# Altium PCB NaviGo v3.0.PcbDoc (part 2 of 4)
Units mm, origin at the board's own origin, x right, y up, seen from the top; angles counter-clockwise.
Board outline 144.78 x 52.07 mm, 2 copper layers (Top Layer, Bottom Layer); 380 components, 29 nets, 1630 pads, 230 vias.
Unrouted connection lines stored in the file: 261.
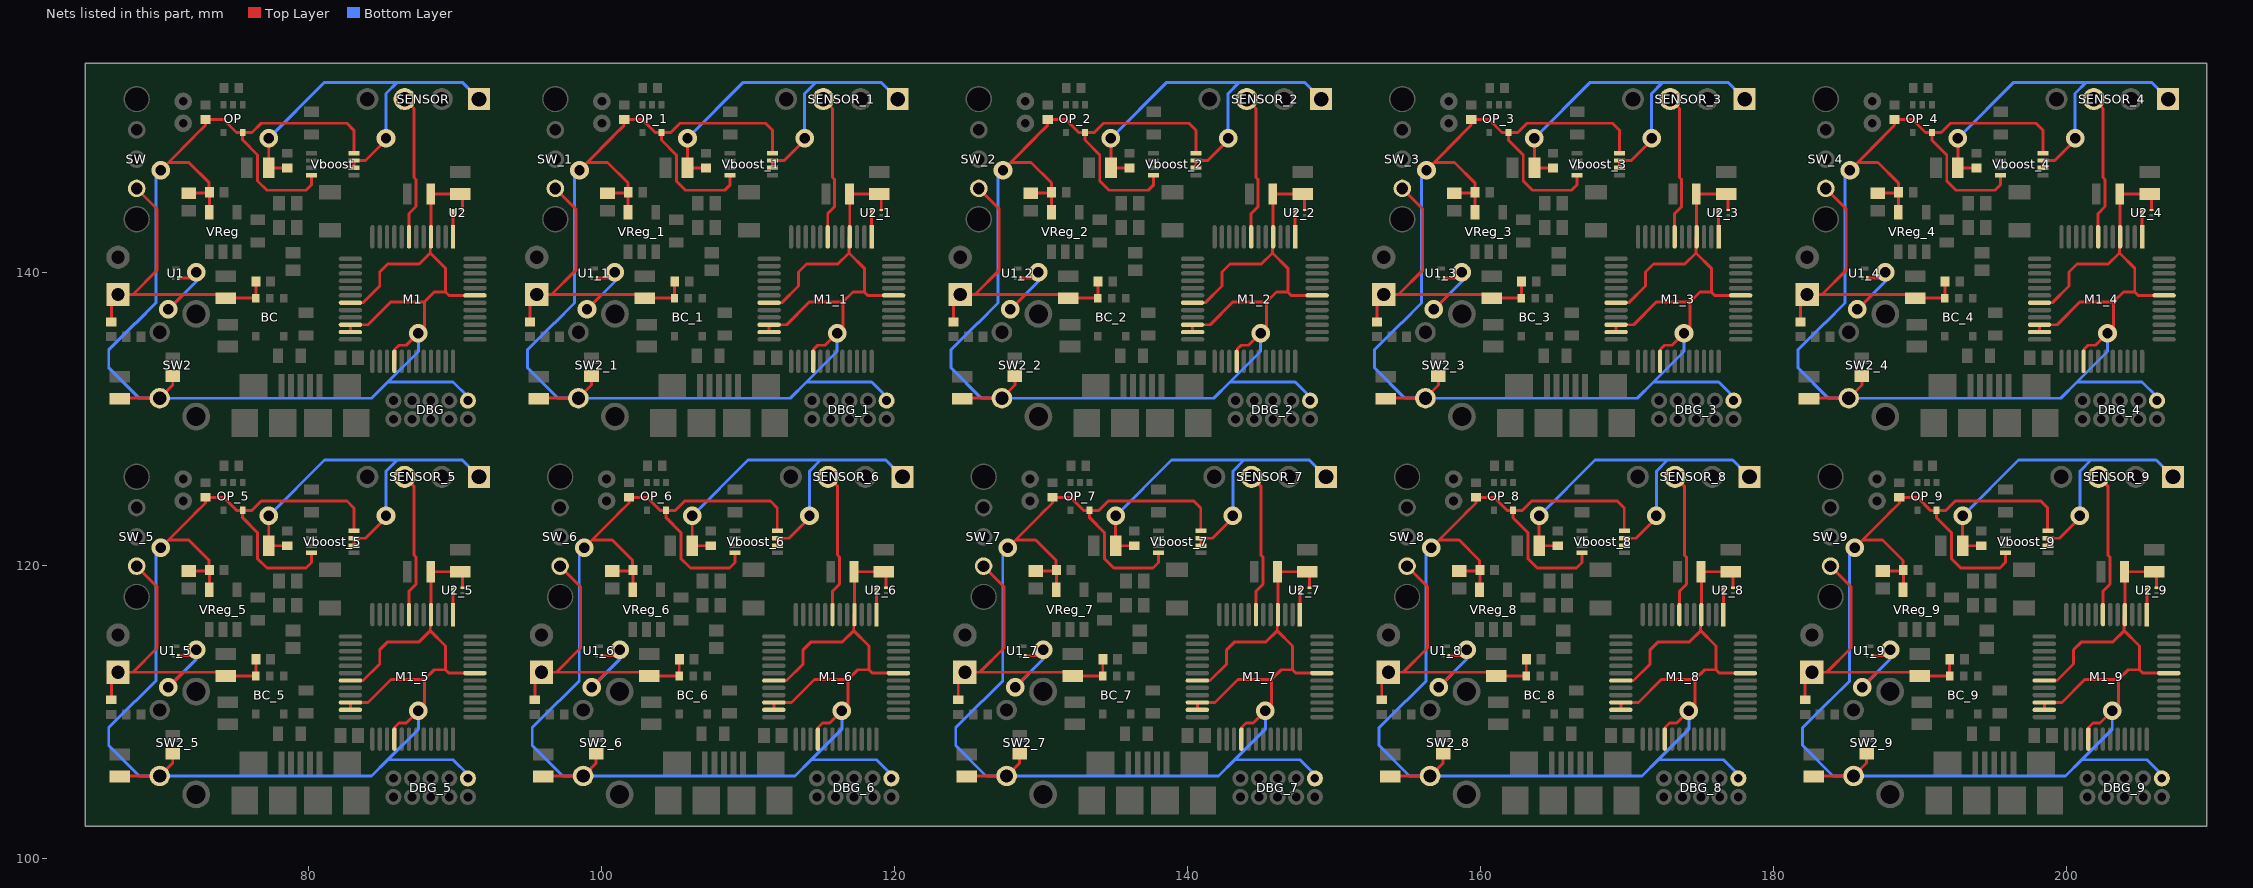
[diagram p2: the nets of this part, all layers, seen from the top]

## Via types
v1: diameter 1.27, hole 0.711, Top Layer to Bottom Layer, 220 vias
v2: diameter 1.1, hole 0.711, Top Layer to Bottom Layer, 10 vias

## Nets (pads, with @x,y where several pads share a name; then routed paths per layer and width w, separated by ;. In a path a pad name is that pad's centre, name@x,y a point inside that pad or via, vN(x,y) a via of type N, cw(c..) or ccw(c..) an arc to the next point about the centre after c; other vN are vias at no path point)
3V5: C1.1 C1_1.1 C1_2.1 C1_3.1 C1_4.1 C1_5.1 C1_6.1 C1_7.1 C1_8.1 C1_9.1 C7.1 C7_1.1 C7_2.1 C7_3.1 C7_4.1 C7_5.1 C7_6.1 C7_7.1 C7_8.1 C7_9.1 C8.1 C8_1.1 C8_2.1 C8_3.1 C8_4.1 C8_5.1 C8_6.1 C8_7.1 C8_8.1 C8_9.1 C12.2 C12_1.2 C12_2.2 C12_3.2 C12_4.2 C12_5.2 C12_6.2 C12_7.2 C12_8.2 C12_9.2 DBG.10 DBG_1.10 DBG_2.10 DBG_3.10 DBG_4.10 DBG_5.10 DBG_6.10 DBG_7.10 DBG_8.10 DBG_9.10 L1.1 L1_1.1 L1_2.1 L1_3.1 L1_4.1 L1_5.1 L1_6.1 L1_7.1 L1_8.1 L1_9.1 M1.4 M1.19 M1.22 M1.23 M1.28 M1.43 M1_1.4 M1_1.19 M1_1.22 M1_1.23 M1_1.28 M1_1.43 M1_2.4 M1_2.19 M1_2.22 M1_2.23 M1_2.28 M1_2.43 M1_3.4 M1_3.19 M1_3.22 M1_3.23 M1_3.28 M1_3.43 M1_4.4 M1_4.19 M1_4.22 M1_4.23 M1_4.28 M1_4.43 M1_5.4 M1_5.19 M1_5.22 M1_5.23 M1_5.28 M1_5.43 M1_6.4 M1_6.19 M1_6.22 M1_6.23 M1_6.28 M1_6.43 M1_7.4 M1_7.19 M1_7.22 M1_7.23 M1_7.28 M1_7.43 M1_8.4 M1_8.19 M1_8.22 M1_8.23 M1_8.28 M1_8.43 M1_9.4 M1_9.19 M1_9.22 M1_9.23 M1_9.28 M1_9.43 OP.5 OP_1.5 OP_2.5 OP_3.5 OP_4.5 OP_5.5 OP_6.5 OP_7.5 OP_8.5 OP_9.5 R6.1 R6_1.1 R6_2.1 R6_3.1 R6_4.1 R6_5.1 R6_6.1 R6_7.1 R6_8.1 R6_9.1 R8.2 R8_1.2 R8_2.2 R8_3.2 R8_4.2 R8_5.2 R8_6.2 R8_7.2 R8_8.2 R8_9.2 SW2.2 SW2_1.2 SW2_2.2 SW2_3.2 SW2_4.2 SW2_5.2 SW2_6.2 SW2_7.2 SW2_8.2 SW2_9.2 U2.3 U2_1.3 U2_2.3 U2_3.3 U2_4.3 U2_5.3 U2_6.3 U2_7.3 U2_8.3 U2_9.3 Vboost.4 Vboost.8 Vboost_1.4 Vboost_1.8 Vboost_2.4 Vboost_2.8 Vboost_3.4 Vboost_3.8 Vboost_4.4 Vboost_4.8 Vboost_5.4 Vboost_5.8 Vboost_6.4 Vboost_6.8 Vboost_7.4 Vboost_7.8 Vboost_8.4 Vboost_8.8 Vboost_9.4 Vboost_9.8 VReg.5 VReg_1.5 VReg_2.5 VReg_3.5 VReg_4.5 VReg_5.5 VReg_6.5 VReg_7.5 VReg_8.5 VReg_9.5 | length 1146.7
  Top Layer w0.2: C7_5.1@67.132,105.632 67.168,105.668 SW2_5.2@69.214,105.668 ; C7.1@67.132,131.413 67.168,131.449 SW2.2@69.214,131.449 ; SW2_5.2@69.849,105.668 70.739,106.558 C8_5.1@70.739,107.188 ; SW2.2@69.849,131.449 70.739,132.339 C8.1@70.739,132.969 ; v1(69.926,121.235) 70.452,121.761 ; v1(69.926,147.016) 70.452,147.542 ; C12_5.2@71.831,119.659 R8_5.2@73.158,119.659 ; C12.2@71.831,145.44 R8.2@73.158,145.44 ; R8_5.2@73.228,119.659 73.228,120.364 71.831,121.761 70.452,121.761 ; R8.2@73.228,145.44 73.228,146.145 71.831,147.542 70.452,147.542 ; VReg_5.5@73.244,118.381 R8_5.2@73.244,119.729 ; VReg.5@73.244,144.162 R8.2@73.244,145.51 ; Vboost_5.4@80.207,120.891 80.207,120.231 79.832,119.856 77.165,119.856 76.53,120.491 76.53,122.269 75.514,123.285 OP_5.5@75.514,123.798 ; Vboost.4@80.207,146.672 80.207,146.012 79.832,145.637 77.165,145.637 76.53,146.272 76.53,148.05 75.514,149.066 OP.5@75.514,149.579 ; M1_5.23@82.865,110.181 M1_5.22@82.865,110.681 84.069,110.681 85.63,112.242 87.914,112.242 ; M1_5.19@82.865,112.181 83.733,112.181 84.866,113.314 84.866,114.274 85.414,114.822 87.556,114.822 88.315,115.581 ; M1.23@82.865,135.962 M1.22@82.865,136.462 84.069,136.462 85.63,138.023 87.914,138.023 ; M1.19@82.865,137.962 83.733,137.962 84.866,139.095 84.866,140.055 85.414,140.603 87.556,140.603 88.315,141.362 ; Vboost_5.8@83.096,122.38 83.096,123.958 82.626,124.428 76.784,124.428 76.154,123.798 OP_5.5@75.514,123.798 ; Vboost.8@83.096,148.161 83.096,149.739 82.626,150.209 76.784,150.209 76.154,149.579 OP.5@75.514,149.579 ; M1_5.28@85.865,108.181 85.915,108.231 85.915,109.017 86.179,109.281 86.675,109.281 v1(87.503,110.109) 87.914,110.52 87.914,112.242 ; M1.28@85.865,133.962 85.915,134.012 85.915,134.798 86.179,135.062 86.675,135.062 v1(87.503,135.89) 87.914,136.301 87.914,138.023 ; v1@87.048,110.181 v1@87.071,110.204 ; v1@87.048,135.962 v1@87.071,135.985 ; C1_5.1@90.373,119.602 L1_5.1@88.341,119.602 88.365,119.578 M1_5.4@88.365,116.681 88.315,116.631 88.315,115.581 ; C1.1@90.373,145.383 L1.1@88.341,145.383 88.365,145.359 M1.4@88.365,142.462 88.315,142.412 88.315,141.362 ; U2_5.3@90.515,118.507 C1_5.1@90.515,119.46 ; U2.3@90.515,144.288 C1.1@90.515,145.241 ; M1_5.43@91.365,112.681 89.599,112.681 89.363,112.917 ; M1.43@91.365,138.462 89.599,138.462 89.363,138.698 ; C7_1.1@95.707,131.413 95.743,131.449 SW2_1.2@97.789,131.449 ; C7_6.1@96.032,105.632 96.068,105.668 SW2_6.2@98.114,105.668 ; SW2_1.2@98.424,131.449 99.314,132.339 C8_1.1@99.314,132.969 ; v1(98.501,147.016) 99.027,147.542 ; SW2_6.2@98.749,105.668 99.639,106.558 C8_6.1@99.639,107.188 ; v1(98.826,121.235) 99.352,121.761 ; C12_1.2@100.406,145.44 R8_1.2@101.733,145.44 ; C12_6.2@100.731,119.659 R8_6.2@102.058,119.659 ; R8_1.2@101.803,145.44 101.803,146.145 100.406,147.542 99.027,147.542 ; VReg_1.5@101.819,144.162 R8_1.2@101.819,145.51 ; R8_6.2@102.128,119.659 102.128,120.364 100.731,121.761 99.352,121.761 ; VReg_6.5@102.144,118.381 R8_6.2@102.144,119.729 ; Vboost_1.4@108.782,146.672 108.782,146.012 108.407,145.637 105.74,145.637 105.105,146.272 105.105,148.05 104.089,149.066 OP_1.5@104.089,149.579 ; Vboost_6.4@109.107,120.891 109.107,120.231 108.732,119.856 106.065,119.856 105.43,120.491 105.43,122.269 104.414,123.285 OP_6.5@104.414,123.798 ; M1_1.23@111.44,135.962 M1_1.22@111.44,136.462 112.644,136.462 114.205,138.023 116.489,138.023 ; M1_1.19@111.44,137.962 112.308,137.962 113.441,139.095 113.441,140.055 113.989,140.603 116.131,140.603 116.89,141.362 ; Vboost_1.8@111.671,148.161 111.671,149.739 111.201,150.209 105.359,150.209 104.729,149.579 OP_1.5@104.089,149.579 ; M1_6.23@111.765,110.181 M1_6.22@111.765,110.681 112.969,110.681 114.53,112.242 116.814,112.242 ; M1_6.19@111.765,112.181 112.633,112.181 113.766,113.314 113.766,114.274 114.314,114.822 116.456,114.822 117.215,115.581 ; Vboost_6.8@111.996,122.38 111.996,123.958 111.526,124.428 105.684,124.428 105.054,123.798 OP_6.5@104.414,123.798 ; M1_1.28@114.44,133.962 114.49,134.012 114.49,134.798 114.754,135.062 115.25,135.062 v1(116.078,135.89) 116.489,136.301 116.489,138.023 ; M1_6.28@114.765,108.181 114.815,108.231 114.815,109.017 115.079,109.281 115.575,109.281 v1(116.403,110.109) 116.814,110.52 116.814,112.242 ; v1@115.623,135.962 v1@115.646,135.985 ; v1@115.948,110.181 v1@115.971,110.204 ; C1_1.1@118.948,145.383 L1_1.1@116.916,145.383 116.94,145.359 M1_1.4@116.94,142.462 116.89,142.412 116.89,141.362 ; U2_1.3@119.09,144.288 C1_1.1@119.09,145.241 ; C1_6.1@119.273,119.602 L1_6.1@117.241,119.602 117.265,119.578 M1_6.4@117.265,116.681 117.215,116.631 117.215,115.581 ; U2_6.3@119.415,118.507 C1_6.1@119.415,119.46 ; M1_1.43@119.94,138.462 118.174,138.462 117.938,138.698 ; M1_6.43@120.265,112.681 118.499,112.681 118.263,112.917 ; C7_2.1@124.607,131.413 124.643,131.449 SW2_2.2@126.689,131.449 ; C7_7.1@124.932,105.632 124.968,105.668 SW2_7.2@127.014,105.668 ; SW2_2.2@127.324,131.449 128.214,132.339 C8_2.1@128.214,132.969 ; v1(127.401,147.016) 127.927,147.542 ; SW2_7.2@127.649,105.668 128.539,106.558 C8_7.1@128.539,107.188 ; v1(127.726,121.235) 128.252,121.761 ; C12_2.2@129.306,145.44 R8_2.2@130.633,145.44 ; C12_7.2@129.631,119.659 R8_7.2@130.958,119.659 ; R8_2.2@130.703,145.44 130.703,146.145 129.306,147.542 127.927,147.542 ; VReg_2.5@130.719,144.162 R8_2.2@130.719,145.51 ; R8_7.2@131.028,119.659 131.028,120.364 129.631,121.761 128.252,121.761 ; VReg_7.5@131.044,118.381 R8_7.2@131.044,119.729 ; Vboost_2.4@137.682,146.672 137.682,146.012 137.307,145.637 134.64,145.637 134.005,146.272 134.005,148.05 132.989,149.066 OP_2.5@132.989,149.579 ; Vboost_7.4@138.007,120.891 138.007,120.231 137.632,119.856 134.965,119.856 134.33,120.491 134.33,122.269 133.314,123.285 OP_7.5@133.314,123.798 ; M1_2.23@140.34,135.962 M1_2.22@140.34,136.462 141.544,136.462 143.105,138.023 145.389,138.023 ; M1_2.19@140.34,137.962 141.208,137.962 142.341,139.095 142.341,140.055 142.889,140.603 145.031,140.603 145.79,141.362 ; Vboost_2.8@140.571,148.161 140.571,149.739 140.101,150.209 134.259,150.209 133.629,149.579 OP_2.5@132.989,149.579 ; M1_7.23@140.665,110.181 M1_7.22@140.665,110.681 141.869,110.681 143.43,112.242 145.714,112.242 ; M1_7.19@140.665,112.181 141.533,112.181 142.666,113.314 142.666,114.274 143.214,114.822 145.356,114.822 146.115,115.581 ; Vboost_7.8@140.896,122.38 140.896,123.958 140.426,124.428 134.584,124.428 133.954,123.798 OP_7.5@133.314,123.798 ; M1_2.28@143.34,133.962 143.39,134.012 143.39,134.798 143.654,135.062 144.15,135.062 v1(144.978,135.89) 145.389,136.301 145.389,138.023 ; M1_7.28@143.665,108.181 143.715,108.231 143.715,109.017 143.979,109.281 144.475,109.281 v1(145.303,110.109) 145.714,110.52 145.714,112.242 ; v1@144.523,135.962 v1@144.546,135.985 ; v1@144.848,110.181 v1@144.871,110.204 ; C1_2.1@147.848,145.383 L1_2.1@145.816,145.383 145.84,145.359 M1_2.4@145.84,142.462 145.79,142.412 145.79,141.362 ; U2_2.3@147.99,144.288 C1_2.1@147.99,145.241 ; C1_7.1@148.173,119.602 L1_7.1@146.141,119.602 146.165,119.578 M1_7.4@146.165,116.681 146.115,116.631 146.115,115.581 ; U2_7.3@148.315,118.507 C1_7.1@148.315,119.46 ; M1_2.43@148.84,138.462 147.074,138.462 146.838,138.698 ; M1_7.43@149.165,112.681 147.399,112.681 147.163,112.917 ; C7_3.1@153.507,131.413 153.543,131.449 SW2_3.2@155.589,131.449 ; C7_8.1@153.832,105.632 153.868,105.668 SW2_8.2@155.914,105.668 ; SW2_3.2@156.224,131.449 157.114,132.339 C8_3.1@157.114,132.969 ; v1(156.301,147.016) 156.827,147.542 ; SW2_8.2@156.549,105.668 157.439,106.558 C8_8.1@157.439,107.188 ; v1(156.626,121.235) 157.152,121.761 ; C12_3.2@158.206,145.44 R8_3.2@159.533,145.44 ; C12_8.2@158.531,119.659 R8_8.2@159.858,119.659 ; R8_3.2@159.603,145.44 159.603,146.145 158.206,147.542 156.827,147.542 ; VReg_3.5@159.619,144.162 R8_3.2@159.619,145.51 ; R8_8.2@159.928,119.659 159.928,120.364 158.531,121.761 157.152,121.761 ; VReg_8.5@159.944,118.381 R8_8.2@159.944,119.729 ; Vboost_3.4@166.582,146.672 166.582,146.012 166.207,145.637 163.54,145.637 162.905,146.272 162.905,148.05 161.889,149.066 OP_3.5@161.889,149.579 ; Vboost_8.4@166.907,120.891 166.907,120.231 166.532,119.856 163.865,119.856 163.23,120.491 163.23,122.269 162.214,123.285 OP_8.5@162.214,123.798 ; M1_3.23@169.24,135.962 M1_3.22@169.24,136.462 170.444,136.462 172.005,138.023 174.289,138.023 ; M1_3.19@169.24,137.962 170.108,137.962 171.241,139.095 171.241,140.055 171.789,140.603 173.931,140.603 174.69,141.362 ; Vboost_3.8@169.471,148.161 169.471,149.739 169.001,150.209 163.159,150.209 162.529,149.579 OP_3.5@161.889,149.579 ; M1_8.23@169.565,110.181 M1_8.22@169.565,110.681 170.769,110.681 172.33,112.242 174.614,112.242 ; M1_8.19@169.565,112.181 170.433,112.181 171.566,113.314 171.566,114.274 172.114,114.822 174.256,114.822 175.015,115.581 ; Vboost_8.8@169.796,122.38 169.796,123.958 169.326,124.428 163.484,124.428 162.854,123.798 OP_8.5@162.214,123.798 ; M1_3.28@172.24,133.962 172.29,134.012 172.29,134.798 172.554,135.062 173.05,135.062 v1(173.878,135.89) 174.289,136.301 174.289,138.023 ; M1_8.28@172.565,108.181 172.615,108.231 172.615,109.017 172.879,109.281 173.375,109.281 v1(174.203,110.109) 174.614,110.52 174.614,112.242 ; v1@173.423,135.962 v1@173.446,135.985 ; v1@173.748,110.181 v1@173.771,110.204 ; C1_3.1@176.748,145.383 L1_3.1@174.716,145.383 174.74,145.359 M1_3.4@174.74,142.462 174.69,142.412 174.69,141.362 ; U2_3.3@176.89,144.288 C1_3.1@176.89,145.241 ; C1_8.1@177.073,119.602 L1_8.1@175.041,119.602 175.065,119.578 M1_8.4@175.065,116.681 175.015,116.631 175.015,115.581 ; U2_8.3@177.215,118.507 C1_8.1@177.215,119.46 ; M1_3.43@177.74,138.462 175.974,138.462 175.738,138.698 ; M1_8.43@178.065,112.681 176.299,112.681 176.063,112.917 ; C7_4.1@182.407,131.413 182.443,131.449 SW2_4.2@184.489,131.449 ; C7_9.1@182.732,105.632 182.768,105.668 SW2_9.2@184.814,105.668 ; SW2_4.2@185.124,131.449 186.014,132.339 C8_4.1@186.014,132.969 ; v1(185.201,147.016) 185.727,147.542 ; SW2_9.2@185.449,105.668 186.339,106.558 C8_9.1@186.339,107.188 ; v1(185.526,121.235) 186.052,121.761 ; C12_4.2@187.106,145.44 R8_4.2@188.433,145.44 ; C12_9.2@187.431,119.659 R8_9.2@188.758,119.659 ; R8_4.2@188.503,145.44 188.503,146.145 187.106,147.542 185.727,147.542 ; VReg_4.5@188.519,144.162 R8_4.2@188.519,145.51 ; R8_9.2@188.828,119.659 188.828,120.364 187.431,121.761 186.052,121.761 ; VReg_9.5@188.844,118.381 R8_9.2@188.844,119.729 ; Vboost_4.4@195.482,146.672 195.482,146.012 195.107,145.637 192.44,145.637 191.805,146.272 191.805,148.05 190.789,149.066 OP_4.5@190.789,149.579 ; Vboost_9.4@195.807,120.891 195.807,120.231 195.432,119.856 192.765,119.856 192.13,120.491 192.13,122.269 191.114,123.285 OP_9.5@191.114,123.798 ; M1_4.23@198.14,135.962 M1_4.22@198.14,136.462 199.344,136.462 200.905,138.023 203.189,138.023 ; M1_4.19@198.14,137.962 199.008,137.962 200.141,139.095 200.141,140.055 200.689,140.603 202.831,140.603 203.59,141.362 ; Vboost_4.8@198.371,148.161 198.371,149.739 197.901,150.209 192.059,150.209 191.429,149.579 OP_4.5@190.789,149.579 ; M1_9.23@198.465,110.181 M1_9.22@198.465,110.681 199.669,110.681 201.23,112.242 203.514,112.242 ; M1_9.19@198.465,112.181 199.333,112.181 200.466,113.314 200.466,114.274 201.014,114.822 203.156,114.822 203.915,115.581 ; Vboost_9.8@198.696,122.38 198.696,123.958 198.226,124.428 192.384,124.428 191.754,123.798 OP_9.5@191.114,123.798 ; M1_4.28@201.14,133.962 201.19,134.012 201.19,134.798 201.454,135.062 201.95,135.062 v1(202.778,135.89) 203.189,136.301 203.189,138.023 ; M1_9.28@201.465,108.181 201.515,108.231 201.515,109.017 201.779,109.281 202.275,109.281 v1(203.103,110.109) 203.514,110.52 203.514,112.242 ; v1@202.323,135.962 v1@202.346,135.985 ; v1@202.648,110.181 v1@202.671,110.204 ; C1_4.1@205.648,145.383 L1_4.1@203.616,145.383 203.64,145.359 M1_4.4@203.64,142.462 203.59,142.412 203.59,141.362 ; U2_4.3@205.79,144.288 C1_4.1@205.79,145.241 ; C1_9.1@205.973,119.602 L1_9.1@203.941,119.602 203.965,119.578 M1_9.4@203.965,116.681 203.915,116.631 203.915,115.581 ; U2_9.3@206.115,118.507 C1_9.1@206.115,119.46 ; M1_4.43@206.64,138.462 204.874,138.462 204.638,138.698 ; M1_9.43@206.965,112.681 205.199,112.681 204.963,112.917 ; 70.452,121.761 72.196,123.505 72.196,123.523 72.974,124.301 R6_5.1@72.974,124.682 74.204,124.682 75.088,123.798 OP_5.5@75.514,123.798 ; 70.452,147.542 72.196,149.286 72.196,149.304 72.974,150.082 R6.1@72.974,150.463 74.204,150.463 75.088,149.579 OP.5@75.514,149.579 ; 87.914,112.242 88.589,112.917 89.363,112.917 ; 87.914,138.023 88.589,138.698 89.363,138.698 ; 88.315,115.581 89.363,114.533 89.363,112.917 ; 88.315,141.362 89.363,140.314 89.363,138.698 ; 99.027,147.542 100.771,149.286 100.771,149.304 101.549,150.082 R6_1.1@101.549,150.463 102.779,150.463 103.663,149.579 OP_1.5@104.089,149.579 ; 99.352,121.761 101.096,123.505 101.096,123.523 101.874,124.301 R6_6.1@101.874,124.682 103.104,124.682 103.988,123.798 OP_6.5@104.414,123.798 ; 116.489,138.023 117.164,138.698 117.938,138.698 ; 116.814,112.242 117.489,112.917 118.263,112.917 ; 116.89,141.362 117.938,140.314 117.938,138.698 ; 117.215,115.581 118.263,114.533 118.263,112.917 ; 127.927,147.542 129.671,149.286 129.671,149.304 130.449,150.082 R6_2.1@130.449,150.463 131.679,150.463 132.563,149.579 OP_2.5@132.989,149.579 ; 128.252,121.761 129.996,123.505 129.996,123.523 130.774,124.301 R6_7.1@130.774,124.682 132.004,124.682 132.888,123.798 OP_7.5@133.314,123.798 ; 145.389,138.023 146.064,138.698 146.838,138.698 ; 145.714,112.242 146.389,112.917 147.163,112.917 ; 145.79,141.362 146.838,140.314 146.838,138.698 ; 146.115,115.581 147.163,114.533 147.163,112.917 ; 156.827,147.542 158.571,149.286 158.571,149.304 159.349,150.082 R6_3.1@159.349,150.463 160.579,150.463 161.463,149.579 OP_3.5@161.889,149.579 ; 157.152,121.761 158.896,123.505 158.896,123.523 159.674,124.301 R6_8.1@159.674,124.682 160.904,124.682 161.788,123.798 OP_8.5@162.214,123.798 ; 174.289,138.023 174.964,138.698 175.738,138.698 ; 174.614,112.242 175.289,112.917 176.063,112.917 ; 174.69,141.362 175.738,140.314 175.738,138.698 ; 175.015,115.581 176.063,114.533 176.063,112.917 ; 185.727,147.542 187.471,149.286 187.471,149.304 188.249,150.082 R6_4.1@188.249,150.463 189.479,150.463 190.363,149.579 OP_4.5@190.789,149.579 ; 186.052,121.761 187.796,123.505 187.796,123.523 188.574,124.301 R6_9.1@188.574,124.682 189.804,124.682 190.688,123.798 OP_9.5@191.114,123.798 ; 203.189,138.023 203.864,138.698 204.638,138.698 ; 203.514,112.242 204.189,112.917 204.963,112.917 ; 203.59,141.362 204.638,140.314 204.638,138.698 ; 203.915,115.581 204.963,114.533 204.963,112.917
  Bottom Layer w0.2: v1(69.926,121.235) 69.583,120.892 69.583,112.155 68.214,110.786 68.188,110.786 66.375,108.972 66.375,107.742 68.449,105.668 SW2_5.2@69.849,105.668 69.854,105.663 84.308,105.663 85.42,106.775 ; v1(69.926,147.016) 69.583,146.673 69.583,137.936 68.214,136.567 68.188,136.567 66.375,134.753 66.375,133.523 68.449,131.449 SW2.2@69.849,131.449 69.854,131.444 84.308,131.444 85.42,132.556 ; v1(87.503,110.109) 87.503,108.858 85.42,106.775 ; v1(87.503,135.89) 87.503,134.639 85.42,132.556 ; DBG_5.10@90.881,105.759 89.865,106.775 85.42,106.775 ; DBG.10@90.881,131.54 89.865,132.556 85.42,132.556 ; v1(98.501,147.016) 98.158,146.673 98.158,137.936 96.789,136.567 96.763,136.567 94.95,134.753 94.95,133.523 97.024,131.449 SW2_1.2@98.424,131.449 98.429,131.444 112.883,131.444 113.995,132.556 ; v1(98.826,121.235) 98.483,120.892 98.483,112.155 97.114,110.786 97.088,110.786 95.275,108.972 95.275,107.742 97.349,105.668 SW2_6.2@98.749,105.668 98.754,105.663 113.208,105.663 114.32,106.775 ; v1(116.078,135.89) 116.078,134.639 113.995,132.556 ; v1(116.403,110.109) 116.403,108.858 114.32,106.775 ; DBG_1.10@119.456,131.54 118.44,132.556 113.995,132.556 ; DBG_6.10@119.781,105.759 118.765,106.775 114.32,106.775 ; v1(127.401,147.016) 127.058,146.673 127.058,137.936 125.689,136.567 125.663,136.567 123.85,134.753 123.85,133.523 125.924,131.449 SW2_2.2@127.324,131.449 127.329,131.444 141.783,131.444 142.895,132.556 ; v1(127.726,121.235) 127.383,120.892 127.383,112.155 126.014,110.786 125.988,110.786 124.175,108.972 124.175,107.742 126.249,105.668 SW2_7.2@127.649,105.668 127.654,105.663 142.108,105.663 143.22,106.775 ; v1(144.978,135.89) 144.978,134.639 142.895,132.556 ; v1(145.303,110.109) 145.303,108.858 143.22,106.775 ; DBG_2.10@148.356,131.54 147.34,132.556 142.895,132.556 ; DBG_7.10@148.681,105.759 147.665,106.775 143.22,106.775 ; v1(156.301,147.016) 155.958,146.673 155.958,137.936 154.589,136.567 154.563,136.567 152.75,134.753 152.75,133.523 154.824,131.449 SW2_3.2@156.224,131.449 156.229,131.444 170.683,131.444 171.795,132.556 ; v1(156.626,121.235) 156.283,120.892 156.283,112.155 154.914,110.786 154.888,110.786 153.075,108.972 153.075,107.742 155.149,105.668 SW2_8.2@156.549,105.668 156.554,105.663 171.008,105.663 172.12,106.775 ; v1(173.878,135.89) 173.878,134.639 171.795,132.556 ; v1(174.203,110.109) 174.203,108.858 172.12,106.775 ; DBG_3.10@177.256,131.54 176.24,132.556 171.795,132.556 ; DBG_8.10@177.581,105.759 176.565,106.775 172.12,106.775 ; v1(185.201,147.016) 184.858,146.673 184.858,137.936 183.489,136.567 183.463,136.567 181.65,134.753 181.65,133.523 183.724,131.449 SW2_4.2@185.124,131.449 185.129,131.444 199.583,131.444 200.695,132.556 ; v1(185.526,121.235) 185.183,120.892 185.183,112.155 183.814,110.786 183.788,110.786 181.975,108.972 181.975,107.742 184.049,105.668 SW2_9.2@185.449,105.668 185.454,105.663 199.908,105.663 201.02,106.775 ; v1(202.778,135.89) 202.778,134.639 200.695,132.556 ; v1(203.103,110.109) 203.103,108.858 201.02,106.775 ; DBG_4.10@206.156,131.54 205.14,132.556 200.695,132.556 ; DBG_9.10@206.481,105.759 205.465,106.775 201.02,106.775
4V2: BC.3 BC_1.3 BC_2.3 BC_3.3 BC_4.3 BC_5.3 BC_6.3 BC_7.3 BC_8.3 BC_9.3 BT1.1 BT1_1.1 BT1_2.1 BT1_3.1 BT1_4.1 BT1_5.1 BT1_6.1 BT1_7.1 BT1_8.1 BT1_9.1 C10.1 C10_1.1 C10_2.1 C10_3.1 C10_4.1 C10_5.1 C10_6.1 C10_7.1 C10_8.1 C10_9.1 R12.2 R12_1.2 R12_2.2 R12_3.2 R12_4.2 R12_5.2 R12_6.2 R12_7.2 R12_8.2 R12_9.2 R13.1 R13_1.1 R13_2.1 R13_3.1 R13_4.1 R13_5.1 R13_6.1 R13_7.1 R13_8.1 R13_9.1 SW.1 SW_1.1 SW_2.1 SW_3.1 SW_4.1 SW_5.1 SW_6.1 SW_7.1 SW_8.1 SW_9.1 U1.3 U1_1.3 U1_2.3 U1_3.3 U1_4.3 U1_5.3 U1_6.3 U1_7.3 U1_8.3 U1_9.3 | length 271.4
  Top Layer w0.2: R13_5.1@66.548,110.871 66.548,112.287 BT1_5.1@67.005,112.744 68.021,112.744 ; R13.1@66.548,136.652 66.548,138.068 BT1.1@67.005,138.525 68.021,138.525 ; SW_5.1@68.275,119.983 69.672,118.586 69.672,114.395 68.021,112.744 ; SW.1@68.275,145.764 69.672,144.367 69.672,140.176 68.021,138.525 ; v1(70.434,111.728) 71.45,112.744 ; v1(70.434,137.509) 71.45,138.525 ; U1_5.3@71.117,113.872 71.943,113.872 v1(72.339,114.268) ; U1.3@71.117,139.653 71.943,139.653 v1(72.339,140.049) ; C10_5.1@74.244,112.744 71.45,112.744 ; C10.1@74.244,138.525 71.45,138.525 ; C10_5.1@74.371,112.49 BC_5.3@76.408,112.49 76.408,113.622 R12_5.2@76.419,113.633 ; C10.1@74.371,138.271 BC.3@76.408,138.271 76.408,139.403 R12.2@76.419,139.414 ; R13_1.1@95.123,136.652 95.123,138.068 BT1_1.1@95.58,138.525 96.596,138.525 ; R13_6.1@95.448,110.871 95.448,112.287 BT1_6.1@95.905,112.744 96.921,112.744 ; SW_1.1@96.85,145.764 98.247,144.367 98.247,140.176 96.596,138.525 ; SW_6.1@97.175,119.983 98.572,118.586 98.572,114.395 96.921,112.744 ; v1(99.009,137.509) 100.025,138.525 ; v1(99.334,111.728) 100.35,112.744 ; U1_1.3@99.692,139.653 100.518,139.653 v1(100.914,140.049) ; U1_6.3@100.017,113.872 100.843,113.872 v1(101.239,114.268) ; C10_1.1@102.819,138.525 100.025,138.525 ; C10_1.1@102.946,138.271 BC_1.3@104.983,138.271 104.983,139.403 R12_1.2@104.994,139.414 ; C10_6.1@103.144,112.744 100.35,112.744 ; C10_6.1@103.271,112.49 BC_6.3@105.308,112.49 105.308,113.622 R12_6.2@105.319,113.633 ; R13_2.1@124.023,136.652 124.023,138.068 BT1_2.1@124.48,138.525 125.496,138.525 ; R13_7.1@124.348,110.871 124.348,112.287 BT1_7.1@124.805,112.744 125.821,112.744 ; SW_2.1@125.75,145.764 127.147,144.367 127.147,140.176 125.496,138.525 ; SW_7.1@126.075,119.983 127.472,118.586 127.472,114.395 125.821,112.744 ; v1(127.909,137.509) 128.925,138.525 ; v1(128.234,111.728) 129.25,112.744 ; U1_2.3@128.592,139.653 129.418,139.653 v1(129.814,140.049) ; U1_7.3@128.917,113.872 129.743,113.872 v1(130.139,114.268) ; C10_2.1@131.719,138.525 128.925,138.525 ; C10_2.1@131.846,138.271 BC_2.3@133.883,138.271 133.883,139.403 R12_2.2@133.894,139.414 ; C10_7.1@132.044,112.744 129.25,112.744 ; C10_7.1@132.171,112.49 BC_7.3@134.208,112.49 134.208,113.622 R12_7.2@134.219,113.633 ; R13_3.1@152.923,136.652 152.923,138.068 BT1_3.1@153.38,138.525 154.396,138.525 ; R13_8.1@153.248,110.871 153.248,112.287 BT1_8.1@153.705,112.744 154.721,112.744 ; SW_3.1@154.65,145.764 156.047,144.367 156.047,140.176 154.396,138.525 ; SW_8.1@154.975,119.983 156.372,118.586 156.372,114.395 154.721,112.744 ; v1(156.809,137.509) 157.825,138.525 ; v1(157.134,111.728) 158.15,112.744 ; U1_3.3@157.492,139.653 158.318,139.653 v1(158.714,140.049) ; U1_8.3@157.817,113.872 158.643,113.872 v1(159.039,114.268) ; C10_3.1@160.619,138.525 157.825,138.525 ; C10_3.1@160.746,138.271 BC_3.3@162.783,138.271 162.783,139.403 R12_3.2@162.794,139.414 ; C10_8.1@160.944,112.744 158.15,112.744 ; C10_8.1@161.071,112.49 BC_8.3@163.108,112.49 163.108,113.622 R12_8.2@163.119,113.633 ; R13_4.1@181.823,136.652 181.823,138.068 BT1_4.1@182.28,138.525 183.296,138.525 ; R13_9.1@182.148,110.871 182.148,112.287 BT1_9.1@182.605,112.744 183.621,112.744 ; SW_4.1@183.55,145.764 184.947,144.367 184.947,140.176 183.296,138.525 ; SW_9.1@183.875,119.983 185.272,118.586 185.272,114.395 183.621,112.744 ; v1(185.709,137.509) 186.725,138.525 ; v1(186.034,111.728) 187.05,112.744 ; U1_4.3@186.392,139.653 187.218,139.653 v1(187.614,140.049) ; U1_9.3@186.717,113.872 187.543,113.872 v1(187.939,114.268) ; C10_4.1@189.519,138.525 186.725,138.525 ; C10_4.1@189.646,138.271 BC_4.3@191.683,138.271 191.683,139.403 R12_4.2@191.694,139.414 ; C10_9.1@189.844,112.744 187.05,112.744 ; C10_9.1@189.971,112.49 BC_9.3@192.008,112.49 192.008,113.622 R12_9.2@192.019,113.633 ; 68.021,112.744 71.45,112.744 ; 68.021,138.525 71.45,138.525 ; 96.596,138.525 100.025,138.525 ; 96.921,112.744 100.35,112.744 ; 125.496,138.525 128.925,138.525 ; 125.821,112.744 129.25,112.744 ; 154.396,138.525 157.825,138.525 ; 154.721,112.744 158.15,112.744 ; 183.296,138.525 186.725,138.525 ; 183.621,112.744 187.05,112.744
  Bottom Layer w0.2: v1(70.434,111.728) 72.339,113.633 v1(72.339,114.268) ; v1(70.434,137.509) 72.339,139.414 v1(72.339,140.049) ; v1(99.009,137.509) 100.914,139.414 v1(100.914,140.049) ; v1(99.334,111.728) 101.239,113.633 v1(101.239,114.268) ; v1(127.909,137.509) 129.814,139.414 v1(129.814,140.049) ; v1(128.234,111.728) 130.139,113.633 v1(130.139,114.268) ; v1(156.809,137.509) 158.714,139.414 v1(158.714,140.049) ; v1(157.134,111.728) 159.039,113.633 v1(159.039,114.268) ; v1(185.709,137.509) 187.614,139.414 v1(187.614,140.049) ; v1(186.034,111.728) 187.939,113.633 v1(187.939,114.268)
5V: C2.1 C2_1.1 C2_2.1 C2_3.1 C2_4.1 C2_5.1 C2_6.1 C2_7.1 C2_8.1 C2_9.1 R1.1 R1_1.1 R1_2.1 R1_3.1 R1_4.1 R1_5.1 R1_6.1 R1_7.1 R1_8.1 R1_9.1 SENSOR.1 SENSOR_1.1 SENSOR_2.1 SENSOR_3.1 SENSOR_4.1 SENSOR_5.1 SENSOR_6.1 SENSOR_7.1 SENSOR_8.1 SENSOR_9.1 Vboost.6 Vboost.7 Vboost_1.6 Vboost_1.7 Vboost_2.6 Vboost_2.7 Vboost_3.6 Vboost_3.7 Vboost_4.6 Vboost_4.7 Vboost_5.6 Vboost_5.7 Vboost_6.6 Vboost_6.7 Vboost_7.6 Vboost_7.7 Vboost_8.6 Vboost_8.7 Vboost_9.6 Vboost_9.7 | length 271.7
  Top Layer w0.2: v1(77.292,123.412) C2_5.1@77.292,121.38 R1_5.1@78.562,121.38 ; v1(77.292,149.193) C2.1@77.292,147.161 R1.1@78.562,147.161 ; Vboost_5.6@83.107,121.391 Vboost_5.7@83.107,121.891 83.899,121.891 85.166,123.158 v1@85.166,123.412 ; Vboost.6@83.107,147.172 Vboost.7@83.107,147.672 83.899,147.672 85.166,148.939 v1@85.166,149.193 ; v1(105.867,149.193) C2_1.1@105.867,147.161 R1_1.1@107.137,147.161 ; v1(106.192,123.412) C2_6.1@106.192,121.38 R1_6.1@107.462,121.38 ; Vboost_1.6@111.682,147.172 Vboost_1.7@111.682,147.672 112.474,147.672 113.741,148.939 v1@113.741,149.193 ; Vboost_6.6@112.007,121.391 Vboost_6.7@112.007,121.891 112.799,121.891 114.066,123.158 v1@114.066,123.412 ; v1(134.767,149.193) C2_2.1@134.767,147.161 R1_2.1@136.037,147.161 ; v1(135.092,123.412) C2_7.1@135.092,121.38 R1_7.1@136.362,121.38 ; Vboost_2.6@140.582,147.172 Vboost_2.7@140.582,147.672 141.374,147.672 142.641,148.939 v1@142.641,149.193 ; Vboost_7.6@140.907,121.391 Vboost_7.7@140.907,121.891 141.699,121.891 142.966,123.158 v1@142.966,123.412 ; v1(163.667,149.193) C2_3.1@163.667,147.161 R1_3.1@164.937,147.161 ; v1(163.992,123.412) C2_8.1@163.992,121.38 R1_8.1@165.262,121.38 ; Vboost_3.6@169.482,147.172 Vboost_3.7@169.482,147.672 170.274,147.672 171.541,148.939 v1@171.541,149.193 ; Vboost_8.6@169.807,121.391 Vboost_8.7@169.807,121.891 170.599,121.891 171.866,123.158 v1@171.866,123.412 ; v1(192.567,149.193) C2_4.1@192.567,147.161 R1_4.1@193.837,147.161 ; v1(192.892,123.412) C2_9.1@192.892,121.38 R1_9.1@194.162,121.38 ; Vboost_4.6@198.382,147.172 Vboost_4.7@198.382,147.672 199.174,147.672 200.441,148.939 v1@200.441,149.193 ; Vboost_9.6@198.707,121.391 Vboost_9.7@198.707,121.891 199.499,121.891 200.766,123.158 v1@200.766,123.412
  Bottom Layer w0.2: v1(77.292,123.412) 81.102,127.222 86.055,127.222 ; v1(77.292,149.193) 81.102,153.003 86.055,153.003 ; v1(85.293,123.412) 85.293,126.46 86.055,127.222 ; v1(85.293,149.193) 85.293,152.241 86.055,153.003 ; SENSOR_5.1@91.643,126.079 90.5,127.222 86.055,127.222 ; SENSOR.1@91.643,151.86 90.5,153.003 86.055,153.003 ; v1(105.867,149.193) 109.677,153.003 114.63,153.003 ; v1(106.192,123.412) 110.002,127.222 114.955,127.222 ; v1(113.868,149.193) 113.868,152.241 114.63,153.003 ; v1(114.193,123.412) 114.193,126.46 114.955,127.222 ; SENSOR_1.1@120.218,151.86 119.075,153.003 114.63,153.003 ; SENSOR_6.1@120.543,126.079 119.4,127.222 114.955,127.222 ; v1(134.767,149.193) 138.577,153.003 143.53,153.003 ; v1(135.092,123.412) 138.902,127.222 143.855,127.222 ; v1(142.768,149.193) 142.768,152.241 143.53,153.003 ; v1(143.093,123.412) 143.093,126.46 143.855,127.222 ; SENSOR_2.1@149.118,151.86 147.975,153.003 143.53,153.003 ; SENSOR_7.1@149.443,126.079 148.3,127.222 143.855,127.222 ; v1(163.667,149.193) 167.477,153.003 172.43,153.003 ; v1(163.992,123.412) 167.802,127.222 172.755,127.222 ; v1(171.668,149.193) 171.668,152.241 172.43,153.003 ; v1(171.993,123.412) 171.993,126.46 172.755,127.222 ; SENSOR_3.1@178.018,151.86 176.875,153.003 172.43,153.003 ; SENSOR_8.1@178.343,126.079 177.2,127.222 172.755,127.222 ; v1(192.567,149.193) 196.377,153.003 201.33,153.003 ; v1(192.892,123.412) 196.702,127.222 201.655,127.222 ; v1(200.568,149.193) 200.568,152.241 201.33,153.003 ; v1(200.893,123.412) 200.893,126.46 201.655,127.222 ; SENSOR_4.1@206.918,151.86 205.775,153.003 201.33,153.003 ; SENSOR_9.1@207.243,126.079 206.1,127.222 201.655,127.222
CHARGE: M1.1 M1_1.1 M1_2.1 M1_3.1 M1_4.1 M1_5.1 M1_6.1 M1_7.1 M1_8.1 M1_9.1 U2.1 U2_1.1 U2_2.1 U2_3.1 U2_4.1 U2_5.1 U2_6.1 U2_7.1 U2_8.1 U2_9.1 | length 16.5
  Top Layer w0.2: M1_5.1@89.865,116.681 U2_5.1@89.865,118.332 ; M1.1@89.865,142.462 U2.1@89.865,144.113 ; M1_1.1@118.44,142.462 U2_1.1@118.44,144.113 ; M1_6.1@118.765,116.681 U2_6.1@118.765,118.332 ; M1_2.1@147.34,142.462 U2_2.1@147.34,144.113 ; M1_7.1@147.665,116.681 U2_7.1@147.665,118.332 ; M1_3.1@176.24,142.462 U2_3.1@176.24,144.113 ; M1_8.1@176.565,116.681 U2_8.1@176.565,118.332 ; M1_4.1@205.14,142.462 U2_4.1@205.14,144.113 ; M1_9.1@205.465,116.681 U2_9.1@205.465,118.332
ECHO: M1.7 M1_1.7 M1_2.7 M1_3.7 M1_4.7 M1_5.7 M1_6.7 M1_7.7 M1_8.7 M1_9.7 SENSOR.3 SENSOR_1.3 SENSOR_2.3 SENSOR_3.3 SENSOR_4.3 SENSOR_5.3 SENSOR_6.3 SENSOR_7.3 SENSOR_8.3 SENSOR_9.3 | length 99.2
  Top Layer w0.2: SENSOR_5.3@86.563,126.079 87.198,125.444 87.198,120.737 87.341,120.594 87.341,118.753 86.865,118.277 M1_5.7@86.865,116.681 ; SENSOR.3@86.563,151.86 87.198,151.225 87.198,146.518 87.341,146.375 87.341,144.534 86.865,144.058 M1.7@86.865,142.462 ; SENSOR_1.3@115.138,151.86 115.773,151.225 115.773,146.518 115.916,146.375 115.916,144.534 115.44,144.058 M1_1.7@115.44,142.462 ; SENSOR_6.3@115.463,126.079 116.098,125.444 116.098,120.737 116.241,120.594 116.241,118.753 115.765,118.277 M1_6.7@115.765,116.681 ; SENSOR_2.3@144.038,151.86 144.673,151.225 144.673,146.518 144.816,146.375 144.816,144.534 144.34,144.058 M1_2.7@144.34,142.462 ; SENSOR_7.3@144.363,126.079 144.998,125.444 144.998,120.737 145.141,120.594 145.141,118.753 144.665,118.277 M1_7.7@144.665,116.681 ; SENSOR_3.3@172.938,151.86 173.573,151.225 173.573,146.518 173.716,146.375 173.716,144.534 173.24,144.058 M1_3.7@173.24,142.462 ; SENSOR_8.3@173.263,126.079 173.898,125.444 173.898,120.737 174.041,120.594 174.041,118.753 173.565,118.277 M1_8.7@173.565,116.681 ; SENSOR_4.3@201.838,151.86 202.473,151.225 202.473,146.518 202.616,146.375 202.616,144.534 202.14,144.058 M1_4.7@202.14,142.462 ; SENSOR_9.3@202.163,126.079 202.798,125.444 202.798,120.737 202.941,120.594 202.941,118.753 202.465,118.277 M1_9.7@202.465,116.681